# EAGLE board v1.0 (EAGLE 9.6.2)

Size 97.59 x 65.71 mm. Coordinates in mm from the lower left corner, seen from the top.
Outline: 0,0 97.59,0 97.59,65.68 0,65.71 0,0
Copper layers (1*16): Top 0.035mm / dielectric 1.5mm / Bottom 0.035mm
Design rules "default": minimum track width 6mil, minimum drill 0.35mm, track to track 6mil, track to pad 6mil, pad to pad 6mil, via to via 6mil, smd to smd 6mil, copper to edge 40mil, drill to drill 6mil, minimum pad ring 10mil, minimum via ring 8mil, stop-mask expansion 4mil, vias tented up to drill 0mil, thermal gap 10mil

## Footprints (pad centres in the part's own frame; a part is rotated, then mirrored left to right if it is on the bottom)
U.FL = smd 2.2 x 0.85: P$1 0,1.375; P$2 0,-1.375 | smd 1.05 x 1: P$3 1.525,0; P$4 -1.525,0
CR1220 = smd 3.2 x 3.2: +$1 -8.225,0; +$2 8.225,0 | smd 6.35 x 6.35: - 0,0
C050-030X075 = drill 0.813 octagon: 1 -2.54,0; 2 2.54,0
C050-024X044 = drill 0.813 octagon: 1 -2.54,0; 2 2.54,0
SOD-323F = smd 1 x 0.8: A -1,0; C 1,0
SSOP16 = smd 0.914 x 0.406: 1 -2.718,2.223; 2 -2.718,1.587; 3 -2.718,0.953; 4 -2.718,0.318; 5 -2.718,-0.318; 6 -2.718,-0.953; 7 -2.718,-1.587; 8 -2.718,-2.223; 9 2.718,-2.223; 10 2.718,-1.587; 11 2.718,-0.953; 12 2.718,-0.318; 13 2.718,0.318; 14 2.718,0.953; 15 2.718,1.587; 16 2.718,2.223
STAND-OFF = hole 3.302: 0,0
JAE_DX07S016JA1R1500 = smd 0.52 x 1: 1 -3.1,1.1; 2 -2.35,1.1; 11 2.35,1.1; 12 3.1,1.1 | smd 0.27 x 1: 3 -1.75,1.1; 4 -1.25,1.1; 5 -0.75,1.1; 6 -0.25,1.1; 7 0.25,1.1; 8 0.75,1.1; 9 1.25,1.1; 10 1.75,1.1 | smd 1 x 2: S1 -1.4,-3.1; S2 1.4,-3.1 | drill 0.65 long: S3 -4.32,0.725; S4 4.32,0.725 | drill 0.65 pad 1.2 long: S5 -4.32,-3.1; S6 4.32,-3.1 | hole 0.6: 3,0 | hole 0.63: 3,0; -3,0
QFP80P900X900X120-32N = smd 1.6 x 0.55: 1 -4.18,2.8; 2 -4.18,2; 3 -4.18,1.2; 4 -4.18,0.4; 5 -4.18,-0.4; 6 -4.18,-1.2; 7 -4.18,-2; 8 -4.18,-2.8; 17 4.18,-2.8; 18 4.18,-2; 19 4.18,-1.2; 20 4.18,-0.4; 21 4.18,0.4; 22 4.18,1.2; 23 4.18,2; 24 4.18,2.8 | smd 0.55 x 1.6: 9 -2.8,-4.18; 10 -2,-4.18; 11 -1.2,-4.18; 12 -0.4,-4.18; 13 0.4,-4.18; 14 1.2,-4.18; 15 2,-4.18; 16 2.8,-4.18; 25 2.8,4.18; 26 2,4.18; 27 1.2,4.18; 28 0.4,4.18; 29 -0.4,4.18; 30 -1.2,4.18; 31 -2,4.18; 32 -2.8,4.18
AMPHENOL_10033854-052FSLF = smd 0.35 x 2: 1 -31.65,-4.1; 2 -31.35,4.1; 3 -31.05,-4.1; 4 -30.75,4.1; 5 -30.45,-4.1; 6 -30.15,4.1; 7 -29.85,-4.1; 8 -29.55,4.1; 9 -29.25,-4.1; 10 -28.95,4.1; 11 -28.65,-4.1; 12 -28.35,4.1; 13 -28.05,-4.1; 14 -27.75,4.1; 15 -27.45,-4.1; 16 -27.15,4.1; 17 -26.85,-4.1; 18 -26.55,4.1; 19 -26.25,-4.1; 20 -25.95,4.1; 21 -25.65,-4.1; 22 -25.35,4.1; 23 -25.05,-4.1; 24 -24.75,4.1; 25 -24.45,-4.1; 26 -24.15,4.1; 27 -23.85,-4.1; 28 -23.55,4.1; 29 -23.25,-4.1; 30 -22.95,4.1; 31 -22.65,-4.1; 32 -22.35,4.1; 33 -22.05,-4.1; 34 -21.75,4.1; 35 -21.45,-4.1; 36 -21.15,4.1; 37 -20.85,-4.1; 38 -20.55,4.1; 39 -20.25,-4.1; 40 -19.95,4.1; 41 -16.05,-4.1; 42 -15.75,4.1; 43 -15.45,-4.1; 44 -15.15,4.1; 45 -14.85,-4.1; 46 -14.55,4.1; 47 -14.25,-4.1; 48 -13.95,4.1; 49 -13.65,-4.1; 50 -13.35,4.1; 51 -13.05,-4.1; 52 -12.75,4.1; 53 -12.45,-4.1; 54 -12.15,4.1; 55 -11.85,-4.1; 56 -11.55,4.1; 57 -11.25,-4.1; 58 -10.95,4.1; 59 -10.65,-4.1; 60 -10.35,4.1; 61 -10.05,-4.1; 62 -9.75,4.1; 63 -9.45,-4.1; 64 -9.15,4.1; 65 -8.85,-4.1; 66 -8.55,4.1; 67 -8.25,-4.1; 68 -7.95,4.1; 69 -7.65,-4.1; 70 -7.35,4.1; 71 -7.05,-4.1; 72 -6.75,4.1; 73 -6.45,-4.1; 74 -6.15,4.1; 75 -5.85,-4.1; 76 -5.55,4.1; 77 -5.25,-4.1; 78 -4.95,4.1; 79 -4.65,-4.1; 80 -4.35,4.1; 81 -4.05,-4.1; 82 -3.75,4.1; 83 -3.45,-4.1; 84 -3.15,4.1; 85 -2.85,-4.1; 86 -2.55,4.1; 87 -2.25,-4.1; 88 -1.95,4.1; 89 -1.65,-4.1; 90 -1.35,4.1; 91 -1.05,-4.1; 92 -0.75,4.1; 93 -0.45,-4.1; 94 -0.15,4.1; 95 0.15,-4.1; 96 0.45,4.1; 97 0.75,-4.1; 98 1.05,4.1; 99 1.35,-4.1; 100 1.65,4.1; 101 1.95,-4.1; 102 2.25,4.1; 103 2.55,-4.1; 104 2.85,4.1; 105 3.15,-4.1; 106 3.45,4.1; 107 3.75,-4.1; 108 4.05,4.1; 109 4.35,-4.1; 110 4.65,4.1; 111 4.95,-4.1; 112 5.25,4.1; 113 5.55,-4.1; 114 5.85,4.1; 115 6.15,-4.1; 116 6.45,4.1; 117 6.75,-4.1; 118 7.05,4.1; 119 7.35,-4.1; 120 7.65,4.1; 121 7.95,-4.1; 122 8.25,4.1; 123 8.55,-4.1; 124 8.85,4.1; 125 9.15,-4.1; 126 9.45,4.1; 127 9.75,-4.1; 128 10.05,4.1; 129 10.35,-4.1; 130 10.65,4.1; 131 10.95,-4.1; 132 11.25,4.1; 133 11.55,-4.1; 134 11.85,4.1; 135 12.15,-4.1; 136 12.45,4.1; 137 12.75,-4.1; 138 13.05,4.1; 139 13.35,-4.1; 140 13.65,4.1; 141 13.95,-4.1; 142 14.25,4.1; 143 14.55,-4.1; 144 14.85,4.1; 145 15.15,-4.1; 146 15.45,4.1; 147 15.75,-4.1; 148 16.05,4.1; 149 16.35,-4.1; 150 16.65,4.1; 151 16.95,-4.1; 152 17.25,4.1; 153 17.55,-4.1; 154 17.85,4.1; 155 18.15,-4.1; 156 18.45,4.1; 157 18.75,-4.1; 158 19.05,4.1; 159 19.35,-4.1; 160 19.65,4.1; 161 19.95,-4.1; 162 20.25,4.1; 163 20.55,-4.1; 164 20.85,4.1; 165 21.15,-4.1; 166 21.45,4.1; 167 21.75,-4.1; 168 22.05,4.1; 169 22.35,-4.1; 170 22.65,4.1; 171 22.95,-4.1; 172 23.25,4.1; 173 23.55,-4.1; 174 23.85,4.1; 175 24.15,-4.1; 176 24.45,4.1; 177 24.75,-4.1; 178 25.05,4.1; 179 25.35,-4.1; 180 25.65,4.1; 181 25.95,-4.1; 182 26.25,4.1; 183 26.55,-4.1; 184 26.85,4.1; 185 27.15,-4.1; 186 27.45,4.1; 187 27.75,-4.1; 188 28.05,4.1; 189 28.35,-4.1; 190 28.65,4.1; 191 28.95,-4.1; 192 29.25,4.1; 193 29.55,-4.1; 194 29.85,4.1; 195 30.15,-4.1; 196 30.45,4.1; 197 30.75,-4.1; 198 31.05,4.1; 199 31.35,-4.1; 200 31.65,4.1 | smd 4.5 x 4.6: S1 -32.55,-12; S2 32.55,-12 | hole 1.7: -33.4,0 | hole 1.2: 33.4,0
0207/9 = drill 0.813 pad 1.676 octagon: 1 -4.572,0; 2 4.572,0
LGA8 = smd 1.9 x 0.6: P$1 -1.5,1.875; P$2 -1.5,0.625; P$3 -1.5,-0.625; P$4 -1.5,-1.875; P$5 1.5,-1.875; P$6 1.5,-0.625; P$7 1.5,0.625; P$8 1.5,1.875
FGPMMOPA6H = smd 2 x 1: P$1 -7.5,6.75; P$2 -7.5,5.25; P$3 -7.5,3.75; P$4 -7.5,2.25; P$5 -7.5,0.75; P$6 -7.5,-0.75; P$7 -7.5,-2.25; P$8 -7.5,-3.75; P$9 -7.5,-5.25; P$10 -7.5,-6.75; P$11 7.5,-6.75; P$12 7.5,-5.25; P$13 7.5,-3.75; P$14 7.5,-2.25; P$15 7.5,-0.75; P$16 7.5,0.75; P$17 7.5,2.25; P$18 7.5,3.75; P$19 7.5,5.25; P$20 7.5,6.75 | hole 3: 0.5,0.85
QFN40P300X300X105-24N = smd 0.64 x 0.22: 1 -1.545,1; 2 -1.545,0.6; 3 -1.545,0.2; 4 -1.545,-0.2; 5 -1.545,-0.6; 6 -1.545,-1; 13 1.545,-1; 14 1.545,-0.6; 15 1.545,-0.2; 16 1.545,0.2; 17 1.545,0.6; 18 1.545,1 | smd 0.22 x 0.64: 7 -1,-1.545; 8 -0.6,-1.545; 9 -0.2,-1.545; 10 0.2,-1.545; 11 0.6,-1.545; 12 1,-1.545; 19 1,1.545; 20 0.6,1.545; 21 0.2,1.545; 22 -0.2,1.545; 23 -0.6,1.545; 24 -1,1.545
1X04-BIG = drill 1.016 pad 1.778: 1 0,0; 2 2.54,0; 3 5.08,0; 4 7.62,0
SOT23-5 = smd 0.55 x 1.2: 1 -0.95,-1.3; 2 0,-1.3; 3 0.95,-1.3; 4 0.95,1.3; 5 -0.95,1.3
RESONATOR = smd 0.7 x 2: 1 -1,0; 2 0,0; 3 1,0

## Placement (x,y rotation side)
ANT1  U.FL  [U.FL]  5.71,16.51 0 top
B1  CR1220  [CR1220]  13.39,7.62 180 top
C1  1µF  [C050-030X075]  25.4,12.7 270 top
C2  1µF  [C050-030X075]  29.21,22.86 0 bottom
C3  0.1µF  [C050-030X075]  46.99,3.81 0 top
C4  0.1µF  [C050-030X075]  49.53,15.24 90 top
C5  1µF  [C050-030X075]  29.21,19.05 0 bottom
C6  2.2uF  [C050-024X044]  29.21,13.97 270 bottom
D1  [SOD-323F]  82.55,25.4 0 top
D2  [SOD-323F]  82.55,21.59 0 top
D3  [SOD-323F]  82.55,17.78 0 top
FT2  FT230XS-US  [SSOP16]  4.19,24.13 0 top
H1  STAND-OFF  [STAND-OFF]  3.56,2.87 0 top
H2  STAND-OFF  [STAND-OFF]  3.56,31.75 0 top
H3  STAND-OFF  [STAND-OFF]  62.23,31.75 0 top
H4  STAND-OFF  [STAND-OFF]  62.23,2.87 0 top
J2  DX07S016JA1R1500  [JAE_DX07S016JA1R1500]  29.21,5.08 0 top
M1  ATMEGA328P-AUR  [QFP80P900X900X120-32N]  39.37,17.78 0 top
M2  DDR2 SODIMM slot  [AMPHENOL_10033854-052FSLF]  36.83,58.42 0 top
R1  10k  [0207/9]  17.78,16.51 0 top
R2  1k  [0207/9]  2.29,15.24 90 top
R3  10k  [0207/9]  80.01,34.29 0 top
S1  MPL115A2T1  [LGA8]  40.64,7.62 0 top
S2  [FGPMMOPA6H]  16.51,26.67 0 top
S3  ICM-20948  [QFN40P300X300X105-24N]  50.8,22.86 0 top
SON_0  [1X04-BIG]  33.02,31.75 0 top
SON_1  [1X04-BIG]  33.02,26.67 0 top
SON_2  [1X04-BIG]  29.21,26.67 90 top
U1  MIC5225-3.3  [SOT23-5]  10.16,16.51 180 top
Y1  16MHz  [RESONATOR]  33.02,15.24 90 top

## Library data of the parts
ANT1 B1 S1 U1 = microbuilder
C1-C6 D1-D3 R1-R3 S2 SON_0 SON_1 SON_2 = adafruit
FT2 = FT230XS-U; AVAILABILITY: Warning; DESCRIPTION: USB Bridge, USB to UART USB 2.0 UART Interface 16-SSOP; MF: FTDI,; MP: FT230XS-U; PACKAGE: SSOP-16 FTDI,; PRICE: None; PURCHASE-URL: https://pricing.snapeda.com/search/part/FT230XS-U/?ref=eda
H1-H4 = SparkFun-Hardware
J2 = DX07S016JA1R1500; AVAILABILITY: Warning; DESCRIPTION: USB-C (USB TYPE-C) USB 2.0 Receptacle Connector 24 (16+8 Dummy) Position Surface Mount, Right Angle; Through Hole; MF: JAE Electronics; MP: DX07S016JA1R1500; PACKAGE: None; PRICE: None; PURCHASE-URL: https://pricing.snapeda.com/search/part/DX07S016JA1R1500/?ref=eda
M1 = ATMEGA328P-AUR; AVAILABILITY: Good; DESCRIPTION: AVR AVR® ATmega Microcontroller IC 8-Bit 20MHz 32KB (16K x 16) FLASH 32-TQFP (7x7); MF: Microchip; MP: ATMEGA328P-AUR; PACKAGE: TQFP-32 Microchip; PRICE: None; PURCHASE-URL: https://pricing.snapeda.com/search/part/ATMEGA328P-AUR/?ref=eda
M2 = 10033854-052FSLF; DESCRIPTION: 200 Position SODIMM DDR2 SDRAM Socket Surface Mount; DIGI-KEY_PART_NUMBER: 609-1008-ND; MF: Amphenol ICC (FCI); MP: 10033854-052FSLF; PACKAGE: None; PURCHASE-URL: https://pricing.snapeda.com/search/part/10033854-052FSLF/?ref=eda
S3 = ICM-20948; AVAILABILITY: Good; DESCRIPTION: Accelerometer, Gyroscope, Magnetometer, 9 Axis Sensor I²C, SPI Output; MF: TDK InvenSense; MP: ICM-20948; PACKAGE: TFQFN-24 TDK InvenSense; PRICE: None; PURCHASE-URL: https://pricing.snapeda.com/search/part/ICM-20948/?ref=eda
Y1 = Cristalli; MONTHLY_USAGE: _____; PART_NUMBER: CSTCE16M0V53-R0; PRICE: _____; SUPPLIER: _____; TYPE: Cristalli

## Nets
+5V: C1.1 C5.1 R1.2 R2.1 S1.P$1 S2.P$1 SON_0.1 SON_1.1 SON_2.1 U1.1
AREF: M1.20
CS_S3: M1.23 S3.22
ECHO_SON: D1.C D2.C D3.C M1.12 R3.2
GND: B1.- C1.2 C2.2 C4.1 C5.2 C6.2 FT2.5 FT2.13 J2.1 J2.12 J2.S1 J2.S2 J2.S3 J2.S4 J2.S5 J2.S6 M1.3 M1.5 M1.21 M2.1 M2.7 M2.8 M2.13 M2.14 M2.19 M2.20 M2.25 M2.26 M2.31 M2.32 M2.37 M2.38 M2.43 M2.44 M2.49 M2.50 M2.55 M2.56 M2.61 M2.62 M2.67 M2.68 M2.73 M2.74 M2.79 M2.80 M2.85 M2.86 M2.91 M2.92 M2.97 M2.98 M2.S1 M2.S2 R3.1 S1.P$3 S2.P$3 S2.P$8 S2.P$19 S3.8 S3.18 S3.20 SON_0.4 SON_1.4 SON_2.4 U1.2 Y1.2
N$2: ANT1.P$1 ANT1.P$2 S2.P$12
N$3: ANT1.P$3 S2.P$11
N$4: R1.1 U1.3
N$5: B1.+$1 B1.+$2 S2.P$4
N$10: C2.1 S1.P$2
N$13: D1.A SON_0.3 SON_1.2
N$14: D2.A SON_1.3 SON_2.2
N$17: C3.2 FT2.2
N$18: D3.A SON_2.3
N$23: M1.7 Y1.3
N$24: M1.8 Y1.1
N$32: C4.2 S3.10
OUT: C6.1 U1.5
RESET: S1.P$5
RESET_M1: C3.1 M1.29 R2.2
RX_M1: FT2.4 M1.30 S2.P$9
SCL_M1: M1.28 S1.P$8 S3.23
SDA_M1: M1.27 S1.P$7 S3.24
SHDN: S1.P$4
TRIG_SON_0: M1.13 SON_0.2
TX_M1: FT2.1 M1.31 S2.P$10
USBDM: FT2.8 J2.5 J2.8
USBDP: FT2.9 J2.6 J2.7
VCC_M1: J2.2 J2.11 M1.4 M1.6 M1.18
VIN: FT2.3 FT2.12 S3.13

## Tracks (layer width: path | path; a pad name or v marks a point on that pad's centre or on a via)
+5V  (9 unrouted)
CS_S3  (1 unrouted)
ECHO_SON  (4 unrouted)
GND  (66 unrouted)
N$2  (2 unrouted)
N$3  (1 unrouted)
N$4  (1 unrouted)
N$5  (2 unrouted)
N$10  (1 unrouted)
N$13  (2 unrouted)
N$14  (2 unrouted)
N$17  (1 unrouted)
N$18  (1 unrouted)
N$23  (1 unrouted)
N$24  (1 unrouted)
N$32  (1 unrouted)
OUT  (1 unrouted)
RESET_M1  (2 unrouted)
RX_M1  (2 unrouted)
SCL_M1  (2 unrouted)
SDA_M1  (2 unrouted)
TRIG_SON_0  (1 unrouted)
TX_M1  (2 unrouted)
USBDM  (2 unrouted)
USBDP  (2 unrouted)
VCC_M1  (4 unrouted)
VIN  (2 unrouted)
(copper drawn outside any net)
  shapes: Top area x2

## Text on the board
tNames: 9D0F / IMU